# EAGLE board main_brd (EAGLE 5.11), part 1 of 2
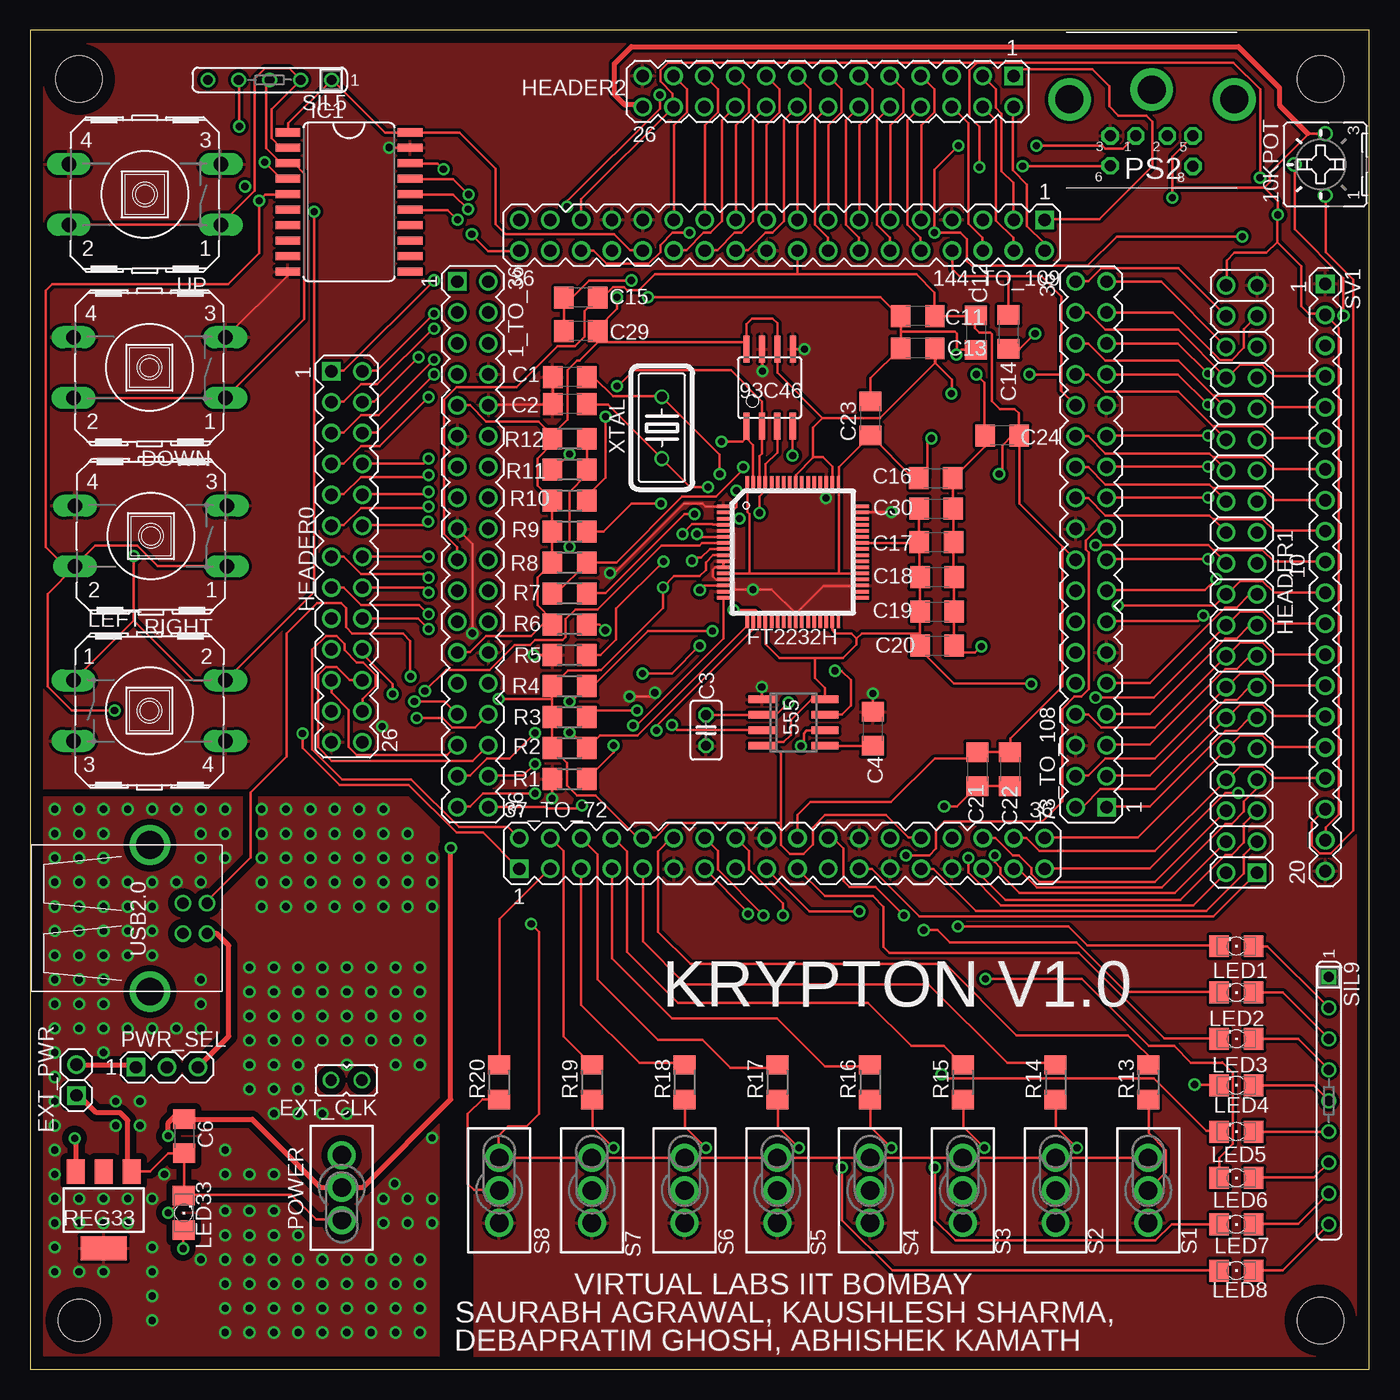
[diagram p0: board, top side]
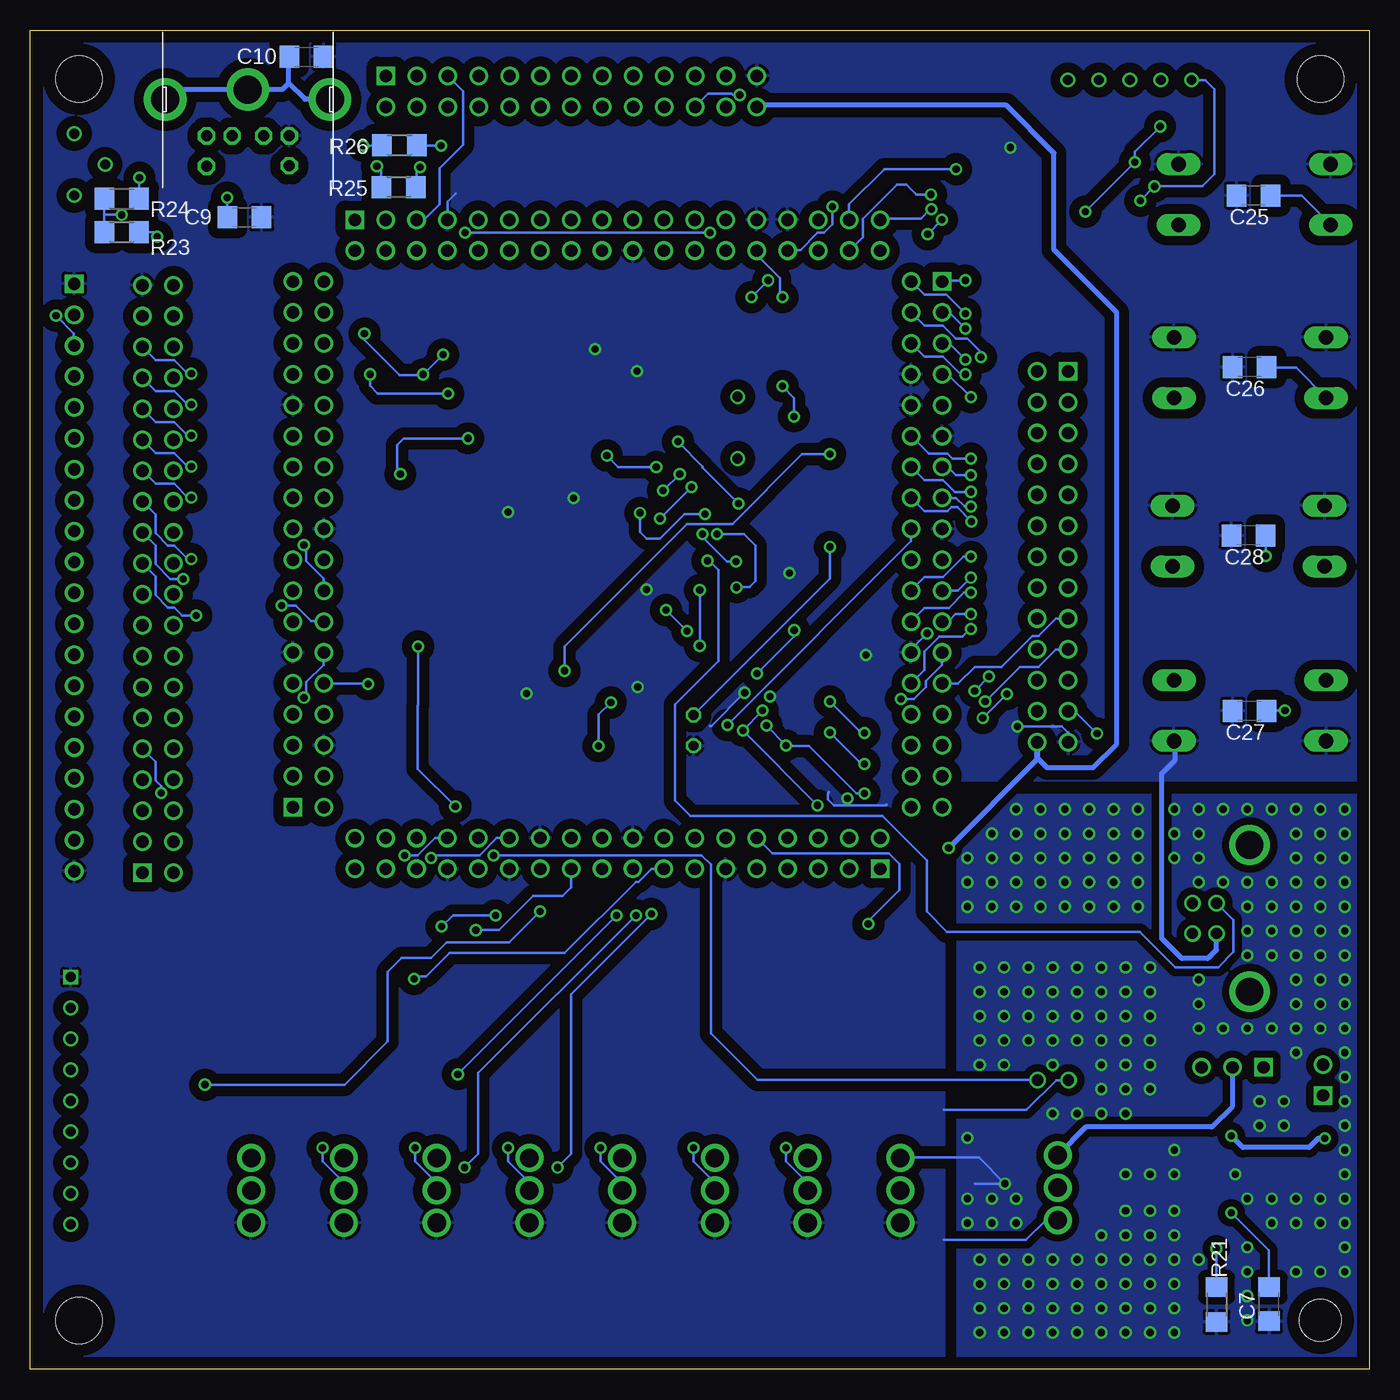
[diagram p1: board, bottom side, seen from below]

Size 110 x 110 mm. Coordinates in mm from the lower left corner, seen from the top.
Outline: 0,0 110,0 110,110 0,110 0,0
Copper layers (1*16): Top 0.07mm / dielectric 1.5mm / Bottom 0.07mm
Design rules "default *": minimum track width 8mil, minimum drill 23mil, track to track 10mil, track to pad 8mil, pad to pad 8mil, via to via 8mil, smd to smd 8mil, copper to edge 40mil, drill to drill 10mil, minimum pad ring 8mil, minimum via ring 8mil, stop-mask expansion 4mil, vias tented up to drill 0mil, thermal gap 10mil
Holes 3.43 mm at 4,4
Holes 3.81 mm at 106,4 106,106 4,106

## Footprints (pad centres in the part's own frame; a part is rotated, then mirrored left to right if it is on the bottom)
MA18-2 = drill 1.016 square: 1 -21.59,-1.27 | drill 1.016 round: 2 -21.59,1.27; 3 -19.05,-1.27; 4 -19.05,1.27; 5 -16.51,-1.27; 6 -16.51,1.27; 7 -13.97,-1.27; 8 -13.97,1.27; 9 -11.43,-1.27; 10 -11.43,1.27; 11 -8.89,-1.27; 12 -8.89,1.27; 13 -6.35,-1.27; 14 -6.35,1.27; 15 -3.81,-1.27; 16 -3.81,1.27; 17 -1.27,-1.27; 18 -1.27,1.27; 19 1.27,-1.27; 20 1.27,1.27; 21 3.81,-1.27; 22 3.81,1.27; 23 6.35,-1.27; 24 6.35,1.27; 25 8.89,-1.27; 26 8.89,1.27; 27 11.43,-1.27; 28 11.43,1.27; 29 13.97,-1.27; 30 13.97,1.27; 31 16.51,-1.27; 32 16.51,1.27; 33 19.05,-1.27; 34 19.05,1.27; 35 21.59,-1.27; 36 21.59,1.27
B25P = drill 0.813 round: A -2.54,0; E 2.54,0; S 0,2.54
SOIC8 = smd 0.5 x 2.2: 1 -1.905,-3.154; 2 -0.645,-3.154; 3 0.625,-3.154; 4 1.895,-3.154; 5 1.905,3.154; 6 0.635,3.154; 7 -0.635,3.154; 8 -1.905,3.154
SO08 = smd 0.6 x 2.2: 1 -1.905,-2.6; 2 -0.635,-2.6; 3 0.635,-2.6; 4 1.905,-2.6; 5 1.905,2.6; 6 0.635,2.6; 7 -0.635,2.6; 8 -1.905,2.6
C1206 = smd 1.6 x 1.8: 1 -1.4,0; 2 1.4,0
C025-025X050 = drill 0.813 octagon: 1 -1.27,0; 2 1.27,0
RACON12 = drill 1.194 long: 1 -6.248,2.489; 2 6.248,2.489; 3 -6.248,-2.489; 4 6.248,-2.489
JP1 = drill 0.914 round: 1 0,-1.27; 2 0,1.27
1X02 = drill 1.016 square: 1 -1.27,0 | drill 1.016 round: 2 1.27,0
LQFP_NEW = smd 1.1 x 0.285: 1 -5.7,3.75; 2 -5.7,3.25; 3 -5.7,2.75; 4 -5.7,2.25; 5 -5.7,1.75; 6 -5.7,1.25; 7 -5.7,0.75; 8 -5.7,0.25; 9 -5.7,-0.25; 10 -5.7,-0.75; 11 -5.7,-1.25; 12 -5.7,-1.75; 13 -5.7,-2.25; 14 -5.7,-2.75; 15 -5.7,-3.25; 16 -5.7,-3.75; 33 5.7,-3.75; 34 5.7,-3.25; 35 5.7,-2.75; 36 5.7,-2.25; 37 5.7,-1.75; 38 5.7,-1.25; 39 5.7,-0.75; 40 5.7,-0.25; 41 5.7,0.25; 42 5.7,0.75; 43 5.7,1.25; 44 5.7,1.75; 45 5.7,2.25; 46 5.7,2.75; 47 5.7,3.25; 48 5.7,3.75 | smd 0.285 x 1.1: 17 -3.75,-5.7; 18 -3.25,-5.7; 19 -2.75,-5.7; 20 -2.25,-5.7; 21 -1.75,-5.7; 22 -1.25,-5.7; 23 -0.75,-5.7; 24 -0.25,-5.7; 25 0.25,-5.7; 26 0.75,-5.7; 27 1.25,-5.7; 28 1.75,-5.7; 29 2.25,-5.7; 30 2.75,-5.7; 31 3.25,-5.7; 32 3.75,-5.7; 49 3.75,5.7; 50 3.25,5.7; 51 2.75,5.7; 52 2.25,5.7; 53 1.75,5.7; 54 1.25,5.7; 55 0.75,5.7; 56 0.25,5.7; 57 -0.25,5.7; 58 -0.75,5.7; 59 -1.25,5.7; 60 -1.75,5.7; 61 -2.25,5.7; 62 -2.75,5.7; 63 -3.25,5.7; 64 -3.75,5.7
MA13-2 = drill 1.016 square: 1 -15.24,-1.27 | drill 1.016 round: 2 -15.24,1.27; 3 -12.7,-1.27; 4 -12.7,1.27; 5 -10.16,-1.27; 6 -10.16,1.27; 7 -7.62,-1.27; 8 -7.62,1.27; 9 -5.08,-1.27; 10 -5.08,1.27; 11 -2.54,-1.27; 12 -2.54,1.27; 13 0,-1.27; 14 0,1.27; 15 2.54,-1.27; 16 2.54,1.27; 17 5.08,-1.27; 18 5.08,1.27; 19 7.62,-1.27; 20 7.62,1.27; 21 10.16,-1.27; 22 10.16,1.27; 23 12.7,-1.27; 24 12.7,1.27; 25 15.24,-1.27; 26 15.24,1.27
2X20 = drill 1.016 square: 1 -24.13,-1.27 | drill 1.016 round: 2 -24.13,1.27; 3 -21.59,-1.27; 4 -21.59,1.27; 5 -19.05,-1.27; 6 -19.05,1.27; 7 -16.51,-1.27; 8 -16.51,1.27; 9 -13.97,-1.27; 10 -13.97,1.27; 11 -11.43,-1.27; 12 -11.43,1.27; 13 -8.89,-1.27; 14 -8.89,1.27; 15 -6.35,-1.27; 16 -6.35,1.27; 17 -3.81,-1.27; 18 -3.81,1.27; 19 -1.27,-1.27; 20 -1.27,1.27; 21 1.27,-1.27; 22 1.27,1.27; 23 3.81,-1.27; 24 3.81,1.27; 25 6.35,-1.27; 26 6.35,1.27; 27 8.89,-1.27; 28 8.89,1.27; 29 11.43,-1.27; 30 11.43,1.27; 31 13.97,-1.27; 32 13.97,1.27; 33 16.51,-1.27; 34 16.51,1.27; 35 19.05,-1.27; 36 19.05,1.27; 37 21.59,-1.27; 38 21.59,1.27; 39 24.13,-1.27; 40 24.13,1.27
SO20W = smd 0.66 x 2.032: 1 -5.715,-5.029; 2 -4.445,-5.029; 3 -3.175,-5.029; 4 -1.905,-5.029; 5 -0.635,-5.029; 6 0.635,-5.029; 7 1.905,-5.029; 8 3.175,-5.029; 9 4.445,-5.029; 10 5.715,-5.029; 11 5.715,5.029; 12 4.445,5.029; 13 3.175,5.029; 14 1.905,5.029; 15 0.635,5.029; 16 -0.635,5.029; 17 -1.905,5.029; 18 -3.175,5.029; 19 -4.445,5.029; 20 -5.715,5.029
1206 = smd 1.6 x 1.803: A -1.422,0; C 1.422,0
TL3XPO = drill 1.524 pad 2.032 round: 1 -2.667,0; 2 0,0; 3 2.667,0
M_DIN6 = drill 0.9 pad 1.422 octagon: 1 -1.3,-3.75; 2 1.3,-3.75; 3 -3.4,-3.75; 5 3.4,-3.75; 6 -3.4,-6.2; 8 3.4,-6.25 | drill 2.3 pad 3.5 round: SH1 6.8,-0.75; SH2 0,0.05; SH3 -6.75,-0.75
MA03-1 = drill 1.016 square: 1 -2.54,0 | drill 1.016 round: 2 0,0; 3 2.54,0
R1206 = smd 1.6 x 1.803: 1 -1.422,0; 2 1.422,0
SOT223 = smd 1.5 x 2: 1 -2.3,-3.15; 2 0,-3.15; 3 2.3,-3.15 | smd 3.8 x 2: 4 0,3.15
SIL5 = drill 0.813 round: 1 -5.08,0; 2 -2.54,0; 3 0,0; 4 2.54,0; 5 5.08,0
SIL9 = drill 0.813 square: 1 -10.16,0 | drill 0.813 round: 2 -7.62,0; 3 -5.08,0; 4 -2.54,0; 5 0,0; 6 2.54,0; 7 5.08,0; 8 7.62,0; 9 10.16,0
MA20-1 = drill 1.016 square: 1 -24.13,0 | drill 1.016 round: 2 -21.59,0; 3 -19.05,0; 4 -16.51,0; 5 -13.97,0; 6 -11.43,0; 7 -8.89,0; 8 -6.35,0; 9 -3.81,0; 10 -1.27,0; 11 1.27,0; 12 3.81,0; 13 6.35,0; 14 8.89,0; 15 11.43,0; 16 13.97,0; 17 16.51,0; 18 19.05,0; 19 21.59,0; 20 24.13,0
USB-B-H = drill 0.914 round: D+ 0,1.25; D- 1.981,1.25; GND 0,-1.25; VBUS 1.981,-1.25 | drill 2.286 round: P$1 -2.718,-6.02; P$2 -2.718,6.02
HC18U-V = drill 0.813 round: 1 -2.54,0; 2 2.54,0

## Placement (x,y rotation side)
1_TO_36  [MA18-2]  36.36,67.77 270 top
10KPOT  [B25P]  106.4,98.98 90 top
37_TO_72  [MA18-2]  61.76,42.37 0 top
73_TO_108  [MA18-2]  87.16,67.77 90 top
93C46  [SOIC8]  60.74,80.65 0 top
144_TO_109  [MA18-2]  61.76,93.17 180 top
555  NE555D  [SO08]  62.7,53.13 270 top
C1  [C1206]  44.31,81.51 180 top
C2  27pf  [C1206]  44.31,79.29 180 top
C3  10uf(E)  [C025-025X050]  55.52,52.49 270 top
C4  [C1206]  69.22,52.61 90 top
C6  100nf  [C1206]  12.64,19.16 270 top
C7  100nf  [C1206]  8.22,5.33 90 bottom
C9  100nf  [C1206]  92.41,94.64 0 bottom
C10  [C1206]  87.32,107.85 0 bottom
C11  3.3uf  [C1206]  72.92,86.51 180 top
C12  3.3uf  [C1206]  77.7,85.17 270 top
C13  4.7uf  [C1206]  72.92,83.87 180 top
C14  4.7uf  [C1206]  80.37,85.22 270 top
C15  4.7uf  [C1206]  45.24,88.04 180 top
C16  4.7uf  [C1206]  74.4,73.23 0 top
C17  100nf  [C1206]  74.45,67.94 0 top
C18  100nf  [C1206]  74.5,65.07 0 top
C19  100nf  [C1206]  74.52,62.26 0 top
C20  100nf  [C1206]  74.5,59.46 0 top
C21  100nf  [C1206]  77.8,49.3 270 top
C22  100nf  [C1206]  80.49,49.3 270 top
C23  100nf  [C1206]  69.04,78.13 90 top
C24  100nf  [C1206]  79.86,76.71 180 top
C25  10uf  [C1206]  9.48,96.43 180 bottom
C26  10uf  [C1206]  9.82,82.33 180 bottom
C27  10uf  [C1206]  9.82,54.09 180 bottom
C28  10uf  [C1206]  9.92,68.49 180 bottom
C29  3.3uf  [C1206]  45.24,85.29 180 top
C30  3.3uf  [C1206]  74.42,70.71 0 top
DOWN  RACON12  [RACON12]  9.78,82.3 180 top
EXT_CLK  [JP1]  25.97,23.74 90 top
EXT_PWR  [1X02]  3.77,23.76 90 top
FT2232H  FT2232H  [LQFP_NEW]  62.65,67.14 0 top
HEADER0  [MA13-2]  26,66.76 270 top
HEADER1  [2X20]  99.53,64.93 90 top
HEADER2  [MA13-2]  65.54,104.99 180 top
IC1  74LS245DW  [SO20W]  26.18,95.9 270 top
LED1  [1206]  99.1,34.75 180 top
LED2  [1206]  99.1,30.94 180 top
LED3  [1206]  99.1,27.13 180 top
LED4  [1206]  99.1,23.32 180 top
LED5  [1206]  99.1,19.51 180 top
LED6  [1206]  99.1,15.7 180 top
LED7  [1206]  99.1,11.89 180 top
LED8  [1206]  99.1,8.08 180 top
LED33  [1206]  12.61,12.83 90 top
LEFT  RACON12  [RACON12]  9.78,54.1 0 top
POWER  [TL3XPO]  25.58,14.9 90 top
PS2  [M_DIN6]  92.13,105.08 0 top
PWR_SEL  [MA03-1]  11.21,24.79 0 top
R1  1k  [R1206]  44.31,48.5 180 top
R2  10k  [R1206]  44.31,51.04 180 top
R3  10k  [R1206]  44.31,53.58 180 top
R4  10k  [R1206]  44.31,56.12 180 top
R5  12k  [R1206]  44.31,58.66 0 top
R6  1k  [R1206]  44.31,61.2 0 top
R7  220  [R1206]  44.31,63.74 0 top
R8  10k  [R1206]  44.31,66.28 180 top
R9  10k  [R1206]  44.31,68.82 180 top
R10  10k  [R1206]  44.31,71.36 180 top
R11  33k  [R1206]  44.31,73.9 0 top
R12  75k  [R1206]  44.31,76.44 0 top
R13  10k  [R1206]  91.86,23.58 90 top
R14  10k  [R1206]  84.24,23.58 90 top
R15  10k  [R1206]  76.62,23.58 90 top
R16  10k  [R1206]  69,23.58 90 top
R17  10k  [R1206]  61.38,23.58 90 top
R18  10k  [R1206]  53.76,23.58 90 top
R19  10k  [R1206]  46.14,23.58 90 top
R20  10k  [R1206]  38.52,23.58 90 top
R21  470  [R1206]  12.53,5.3 90 bottom
R23  2k  [R1206]  102.49,93.42 180 bottom
R24  2k  [R1206]  102.49,96.17 180 bottom
R25  120  [R1206]  79.73,97.13 180 bottom
R26  120  [R1206]  79.68,100.56 180 bottom
REG33  [SOT223]  6.03,13.07 180 top
RIGHT  RACON12  [RACON12]  9.91,68.45 180 top
S1  [TL3XPO]  91.86,14.69 270 top
S2  [TL3XPO]  84.24,14.69 270 top
S3  [TL3XPO]  76.62,14.69 270 top
S4  [TL3XPO]  69,14.69 270 top
S5  [TL3XPO]  61.38,14.69 270 top
S6  [TL3XPO]  53.76,14.69 270 top
S7  [TL3XPO]  46.14,14.69 270 top
S8  [TL3XPO]  38.52,14.69 270 top
SIL5  10k  [SIL5]  19.66,105.93 180 top
SIL9  470  [SIL9]  106.69,22.05 270 top
SV1  [MA20-1]  106.4,65.05 270 top
UP  RACON12  [RACON12]  9.4,96.52 180 top
USB2.0  [USB-B-H]  12.53,37.04 0 top
XTAL  [HC18U-V]  51.88,77.35 90 top

## Library data of the parts
1_TO_36 37_TO_72 73_TO_108 144_TO_109 HEADER0 HEADER2 PWR_SEL SV1 = con-lstb; OC_FARNELL: unknown; OC_NEWARK: unknown
10KPOT = pot
93C46 = atmel
555 = linear
C1 C2 C4 C6 C7 C9 C10 C25-C28 R1-R21 R23-R26 = resistor
C3 C11-C24 C29 C30 = rcl
DOWN LEFT RIGHT UP = switch-misc
EXT_CLK = jumper
EXT_PWR HEADER1 = pinhead
FT2232H = ft2232h_lqfp64
IC1 = 74xx-us
LED1-LED8 LED33 = led
POWER S1-S8 = switch
PS2 = mini_din
REG33 = v-reg
SIL5 = resistor-sil; OC_FARNELL: unknown; OC_NEWARK: unknown
SIL9 = resistor-sil
USB2.0 = con-usb-3
XTAL = crystal; OC_FARNELL: unknown; OC_NEWARK: unknown

## Nets
0: PS2.6 R25.2
1: 1_TO_36.1 HEADER0.1
2: 1_TO_36.2 HEADER0.2
3: 1_TO_36.3 HEADER0.3
4: 1_TO_36.4 HEADER0.4
5: 1_TO_36.5 HEADER0.5
6: 1_TO_36.6 HEADER0.6
7: 1_TO_36.7 HEADER0.7
010: PS2.1 R26.2
12: 1_TO_36.12 HEADER0.8
13: 1_TO_36.13 HEADER0.9
14: 1_TO_36.14 HEADER0.10
15: 1_TO_36.15 HEADER0.11
16: 1_TO_36.16 HEADER0.12
21: 1_TO_36.21 HEADER0.13
22: 1_TO_36.22 HEADER0.14
23: 1_TO_36.23 HEADER0.15
24: 1_TO_36.24 HEADER0.16
27: 1_TO_36.27 HEADER0.17
28: 1_TO_36.28 HEADER0.18
29: 1_TO_36.29 HEADER0.19
30: 1_TO_36.30 HEADER0.20
31: 1_TO_36.31 HEADER0.21
32: 1_TO_36.32 HEADER0.22
37: 37_TO_72.1 HEADER0.23
38: 37_TO_72.2 HEADER0.24
39: 37_TO_72.3 R20.2
40: 37_TO_72.4 R19.2
41: 37_TO_72.5 R18.2
42: 37_TO_72.6 R17.2
43: 37_TO_72.7 R16.2
44: 37_TO_72.8 R15.2
45: 37_TO_72.9 R14.2
48: 37_TO_72.12 R13.2
49: 37_TO_72.13 LED8.C
50: 37_TO_72.14 LED7.C
51: 37_TO_72.15 LED6.C
52: 37_TO_72.16 LED5.C
53: 37_TO_72.17 LED4.C
55: 37_TO_72.19 LED3.C
57: 37_TO_72.21 LED2.C
58: 37_TO_72.22 LED1.C
59: 37_TO_72.23 HEADER1.1
62: 37_TO_72.26 HEADER1.2
63: 37_TO_72.27 HEADER1.3
66: 37_TO_72.30 HEADER1.4
67: 37_TO_72.31 HEADER1.5
68: 37_TO_72.32 HEADER1.6
69: 37_TO_72.33 HEADER1.7
70: 37_TO_72.34 HEADER1.8 SV1.17
71: 37_TO_72.35 HEADER1.9
72: 37_TO_72.36 HEADER1.10 SV1.16
73: 73_TO_108.1 HEADER1.11
74: 73_TO_108.2 HEADER1.12 SV1.15
75: 73_TO_108.3 HEADER1.13
76: 73_TO_108.4 HEADER1.14 SV1.14
77: 73_TO_108.5 HEADER1.15
79: 73_TO_108.7 HEADER1.17
80: 73_TO_108.8 HEADER1.16 SV1.13
81: 73_TO_108.9 HEADER1.19
84: 73_TO_108.12 HEADER1.18 SV1.12
85: 73_TO_108.13 HEADER1.21
86: 73_TO_108.14 HEADER1.20 SV1.11
87: 73_TO_108.15 HEADER1.23
88: 73_TO_108.16 HEADER1.22 SV1.10
89: 73_TO_108.17 HEADER1.25
93: 73_TO_108.21 HEADER1.27
94: 73_TO_108.22 HEADER1.24 SV1.9
95: 73_TO_108.23 HEADER1.29
96: 73_TO_108.24 HEADER1.26 SV1.8
97: 73_TO_108.25 HEADER1.31
98: 73_TO_108.26 HEADER1.28 SV1.7
101: 73_TO_108.29 HEADER1.33
102: 73_TO_108.30 HEADER1.30 SV1.6
103: 73_TO_108.31 HEADER1.35
104: 73_TO_108.32 HEADER1.32 SV1.5
105: 73_TO_108.33 HEADER1.37
106: 73_TO_108.34 HEADER1.34 SV1.4
107: 73_TO_108.35 HEADER1.36
108: 73_TO_108.36 HEADER1.38
109: 144_TO_109.1 HEADER2.1
110: 144_TO_109.2 HEADER2.2
111: 144_TO_109.3 HEADER2.3
112: 144_TO_109.4 HEADER2.4
113: 144_TO_109.5 HEADER2.5
114: 144_TO_109.6 HEADER2.6
117: 144_TO_109.9 HEADER2.7
118: 144_TO_109.10 HEADER2.8
119: 144_TO_109.11 HEADER2.9
120: 144_TO_109.12 HEADER2.10
121: 144_TO_109.13 HEADER2.11
122: 144_TO_109.14 HEADER2.12
123: 144_TO_109.15 HEADER2.13
124: 144_TO_109.16 HEADER2.14
125: 144_TO_109.17 HEADER2.15
127: 144_TO_109.19 HEADER2.17
129: 144_TO_109.21 HEADER2.19
130: 144_TO_109.22 HEADER2.16
131: 144_TO_109.23 HEADER2.21
132: 144_TO_109.24 HEADER2.18
133: 144_TO_109.25 HEADER2.23
134: 144_TO_109.26 HEADER2.20
138: 144_TO_109.30 HEADER2.22
139: 144_TO_109.31 HEADER2.24 R24.1 R25.1
140: 144_TO_109.32 R23.1 R26.1
141: 144_TO_109.33 IC1.18
142: 144_TO_109.34 IC1.17
143: 144_TO_109.35 IC1.16
144: 144_TO_109.36 IC1.15
C: 555.2 555.6 C3.1 R11.2 R12.2
CLK: 1_TO_36.20
CLK_1H: 1_TO_36.18 555.3
D+: FT2232H.8 USB2.0.D+
D-: FT2232H.7 USB2.0.D-
DOWN: C26.1 DOWN.1 DOWN.2 IC1.3 SIL5.3
EECLK: 93C46.2 FT2232H.62 R10.1
EECS: 93C46.1 FT2232H.63 R9.1
EEDATA: 93C46.3 FT2232H.61 R7.2
EXT_CLK: 73_TO_108.19 EXT_CLK.1
GND: 1_TO_36.8 1_TO_36.10 1_TO_36.11 1_TO_36.17 1_TO_36.26 37_TO_72.11 37_TO_72.18 37_TO_72.24 37_TO_72.25 37_TO_72.29 73_TO_108.6 73_TO_108.11 73_TO_108.20 73_TO_108.27 93C46.5 93C46.7 144_TO_109.7 144_TO_109.20 144_TO_109.27 144_TO_109.29 555.1 C1.2 C2.2 C3.2 C4.2 C6.2 C7.2 C9.2 C10.2 C25.2 C26.2 C27.2 C28.2 DOWN.3 DOWN.4 EXT_CLK.2 EXT_PWR.1 FT2232H.1 FT2232H.5 FT2232H.10 FT2232H.11 FT2232H.13 FT2232H.15 FT2232H.25 FT2232H.35 FT2232H.47 FT2232H.51 HEADER0.25 HEADER1.39 HEADER2.25 IC1.10 IC1.19 LED33.C LEFT.3 LEFT.4 POWER.1 PS2.3 R1.2 R5.1 REG33.1 RIGHT.3 RIGHT.4 S1.3 S2.3 S3.3 S4.3 S5.3 S6.3 S7.3 S8.3 SIL9.1 SV1.1 SV1.20 UP.3 UP.4 USB2.0.GND
LEFT: C28.1 IC1.4 LEFT.1 LEFT.2 SIL5.4
N$2: C11.2 C12.2 C13.2 C14.2 C15.2 C16.2 C17.2 C18.2 C19.2 C20.2 C21.2 C22.2 C23.2 C24.2 C29.2 C30.2
N$3: LED33.A R21.2
N$5: FT2232H.6 R5.2
N$6: FT2232H.14 R6.2
N$7: PS2.2
N$9: 93C46.4 R7.1 R8.1
N$18: 555.7 R11.1
N$19: LED1.A SIL9.2
N$21: LED5.A SIL9.6
N$22: LED7.A SIL9.8
N$23: LED2.A SIL9.3
N$24: LED4.A SIL9.5
N$25: LED6.A SIL9.7
N$26: LED8.A SIL9.9
N$27: 555.5 C4.1
N$28: R13.1 S1.2
N$29: PS2.8
N$30: R14.1 S2.2
N$31: R15.1 S3.2
N$32: R16.1 S4.2
N$33: R17.1 S5.2
N$34: R18.1 S6.2
N$35: R19.1 S7.2
N$36: R20.1 S8.2
N$39: C10.1 PS2.SH1 PS2.SH2 PS2.SH3
N$40: EXT_PWR.2 PWR_SEL.1
N$49: IC1.6
N$50: IC1.7
N$51: IC1.8
N$52: IC1.9
N$57: IC1.14
N$58: IC1.13
N$59: IC1.12
N$60: IC1.11
OSCI: C1.1 FT2232H.2 XTAL.2
OSCO: C2.1 FT2232H.3 XTAL.1
RIGHT: C27.1 IC1.5 RIGHT.1 RIGHT.2 SIL5.5
SIL10: LED3.A SIL9.4
TCK: 1_TO_36.35 FT2232H.16 R1.1
TDI: 1_TO_36.34 FT2232H.17 R2.1
TDO: 1_TO_36.36 FT2232H.18 R3.1
TMS: 1_TO_36.33 FT2232H.19 R4.1
UP: C25.1 IC1.2 SIL5.2 UP.1 UP.2
VBUS: PWR_SEL.3 USB2.0.VBUS
VCC: 10KPOT.E C6.1 C9.1 HEADER0.26 HEADER1.40 HEADER2.26 POWER.2 PS2.5 R23.2 R24.2 REG33.3 SV1.2 SV1.19
VCCINT: 1_TO_36.19 37_TO_72.20 73_TO_108.18 144_TO_109.18 C11.1 C12.1 C15.1 C16.1 C21.1 C22.1 C23.1 C24.1 FT2232H.12 FT2232H.37 FT2232H.49 FT2232H.64
VCCIO: 1_TO_36.9 1_TO_36.25 37_TO_72.10 37_TO_72.28 73_TO_108.10 73_TO_108.28 93C46.6 93C46.8 144_TO_109.8 144_TO_109.28 555.4 555.8 C7.1 C13.1 C14.1 C17.1 C18.1 C19.1 C20.1 C29.1 C30.1 FT2232H.4 FT2232H.9 FT2232H.20 FT2232H.31 FT2232H.42 FT2232H.50 FT2232H.56 IC1.1 IC1.20 R2.2 R3.2 R4.2 R6.1 R8.2 R9.2 R10.2 R12.1 R21.1 REG33.4 S1.1 S2.1 S3.1 S4.1 S5.1 S6.1 S7.1 S8.1 SIL5.1
VO: 10KPOT.A SV1.18
VOUT: 10KPOT.S SV1.3
XXX: POWER.3 PWR_SEL.2